# EAGLE board CapMeter-LCD-16F628A (EAGLE 7.6.0)
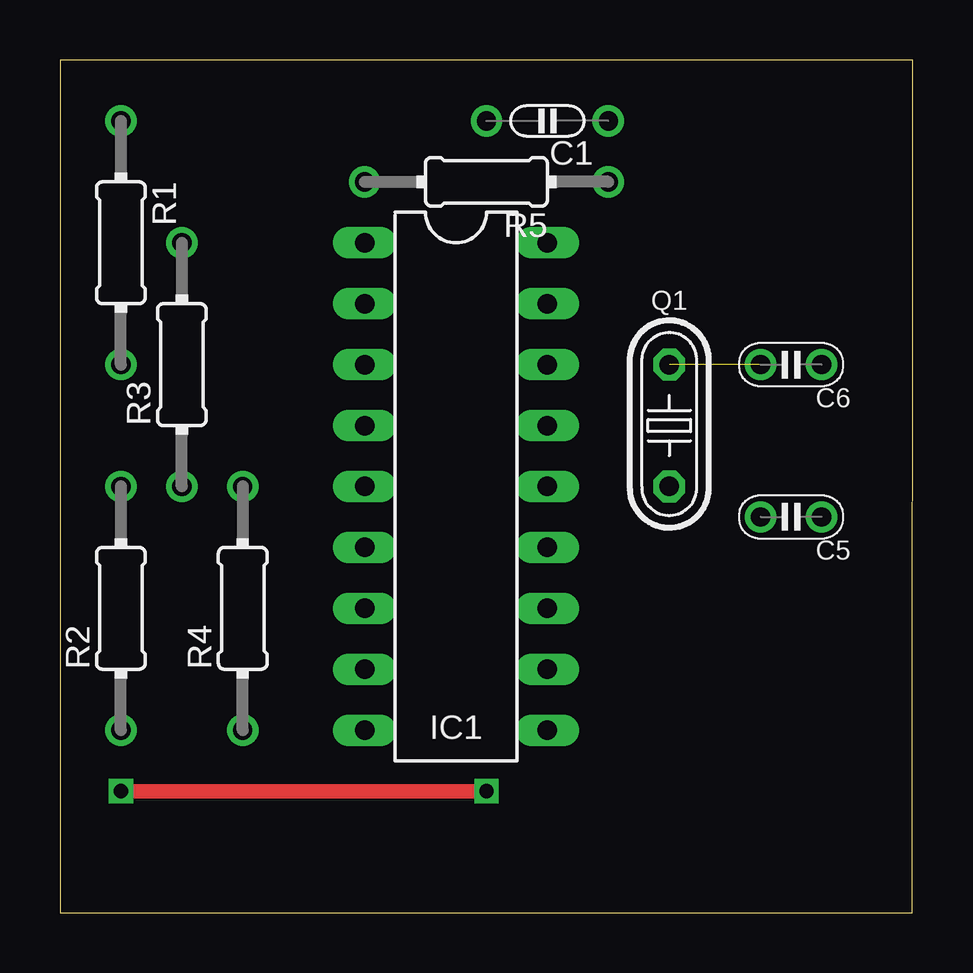
[diagram p0: board, top side]
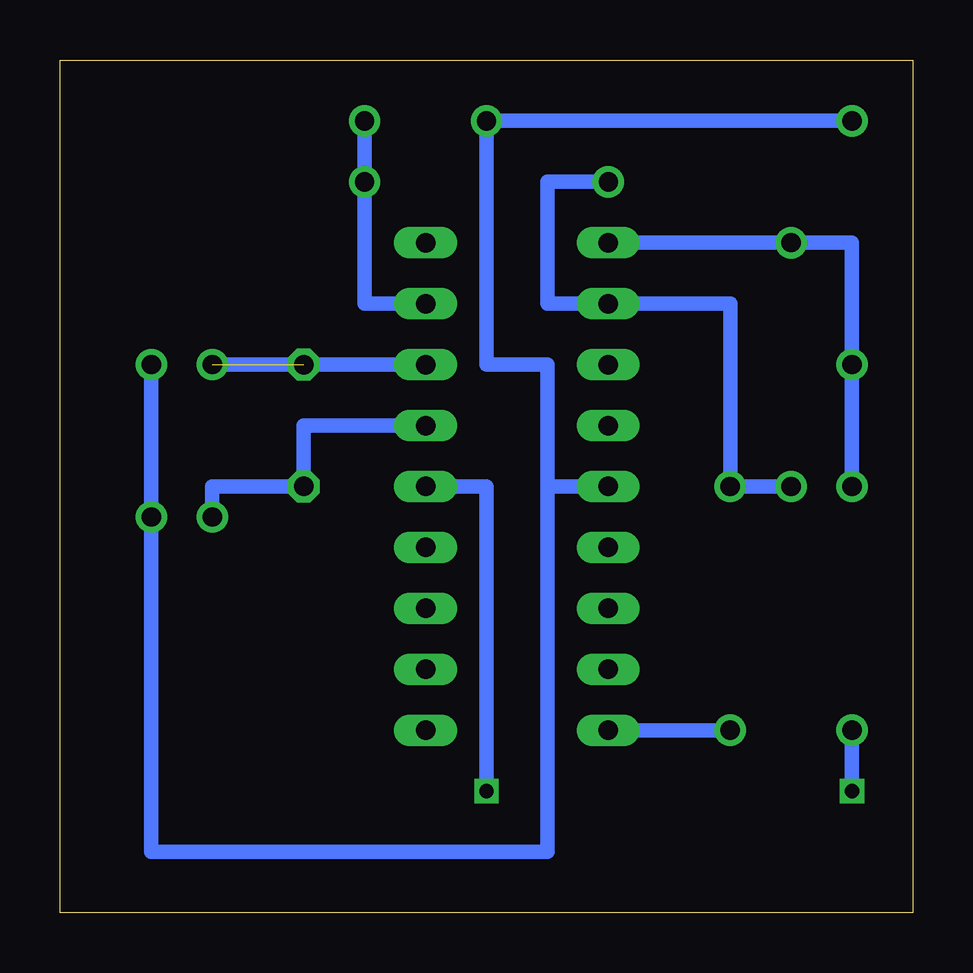
[diagram p1: board, bottom side, seen from below]

Size 35.56 x 35.56 mm. Coordinates in mm from the lower left corner, seen from the top.
Outline: 0,0 35.54,0 35.56,34.29 35.56,35.56 0,35.56 0,0
Copper layers (1*16): Top 0.035mm / dielectric 1.5mm / Bottom 0.035mm
Design rules "default": minimum track width 10mil, minimum drill 24mil, track to track 8mil, track to pad 8mil, pad to pad 8mil, via to via 8mil, smd to smd 8mil, copper to edge 40mil, drill to drill 8mil, minimum pad ring 10mil, minimum via ring 8mil, stop-mask expansion 4mil, vias tented up to drill 0mil, thermal gap 10mil
Net classes: 0 default: width 0.61 mm

## Footprints (pad centres in the part's own frame; a part is rotated, then mirrored left to right if it is on the bottom)
C050-020X036 = drill 0.8: 1 0,-2.54; 2 0,2.54
C025-020X036 = drill 0.8: 1 0,0; 2 2.54,0
DIL18-3/V = drill 0.813 long: 1 -3.81,10.16; 2 -3.81,7.62; 3 -3.81,5.08; 4 -3.81,2.54; 5 -3.81,0; 6 -3.81,-2.54; 7 -3.81,-5.08; 8 -3.81,-7.62; 9 -3.81,-10.16; 10 3.81,-10.16; 11 3.81,-7.62; 12 3.81,-5.08; 13 3.81,-2.54; 14 3.81,0; 15 3.81,2.54; 16 3.81,5.08; 17 3.81,7.62; 18 3.81,10.16
HC49 = drill 0.813 octagon: 1 0,-2.54; 2 0,2.54
0204/10 = drill 0.8: 1 -5.08,0; 2 5.08,0

## Placement (x,y rotation side)
C1  270pF  [C050-020X036]  20.32,33.02 90 top
C5  33pF  [C025-020X036]  31.75,16.51 180 top
C6  33pF  [C025-020X036]  31.75,22.86 180 top
IC1  PIC16F628A-COMP  [DIL18-3/V]  16.51,17.78 0 top
Q1  20MHz  [HC49]  25.4,20.32 0 top
R1  1.5k  [0204/10]  2.54,27.94 270 top
R2  1.5k  [0204/10]  2.54,12.7 90 top
R3  1.5k  [0204/10]  5.08,22.86 90 top
R4  1.5k  [0204/10]  7.62,12.7 90 top
R5  10k  [0204/10]  17.78,30.48 180 top

## Library data of the parts
C1 C5 C6 = c
IC1 = mcu
Q1 = q
R1-R5 = r

## Nets
GND: C1.2 C5.1 C6.1 IC1.5 R1.1
N$1: IC1.2 R3.1 R4.2 R5.2
N$2: IC1.9 R4.1
N$3: IC1.1 R1.2 R2.2 R3.2
N$4: C1.1 IC1.17 R5.1
OSC1: C6.2 IC1.16 Q1.2
OSC2: C5.2 IC1.15 Q1.1
VCC: IC1.14 R2.1

## Tracks (layer width: path | path; a pad name or v marks a point on that pad's centre or on a via)
GND
  Bottom 0.61: R1.1 C1.2 17.78,22.86 15.24,22.86 15.24,17.78 | C6.1 C5.1 31.75,2.54 15.24,2.54 15.24,17.78 | IC1.5 15.24,17.78
N$1
  Bottom 0.61: R5.2 15.24,30.48 15.24,25.4 IC1.2 7.62,25.4 R4.2 R3.1
N$2
  Bottom 0.61: R4.1 IC1.9
N$3
  Bottom 0.61: IC1.1 R3.2 2.54,27.94 R1.2 R2.2
N$4
  Bottom 0.61: IC1.17 22.86,25.4 C1.1 R5.1
OSC1  (1 unrouted)
  Bottom 0.61: C6.2 IC1.16
OSC2
  Bottom 0.61: IC1.15 25.4,20.32 Q1.1 29.21,17.78 C5.2
VCC  (via drill 0.6)
  Top 0.61: v17.78,5.08 v2.54,5.08
  Bottom 0.61: IC1.14 17.78,17.78 v17.78,5.08 | v2.54,5.08 R2.1